# Altium PCB Panel.PcbDoc
Units mm, origin at the board's own origin, x right, y up, seen from the top; angles counter-clockwise.
Board outline 152.4 x 101.6 mm, 2 copper layers (Top Layer, Bottom Layer); 16 components, 22 nets, 90 pads, 0 vias.
Unrouted connection lines stored in the file: 6.
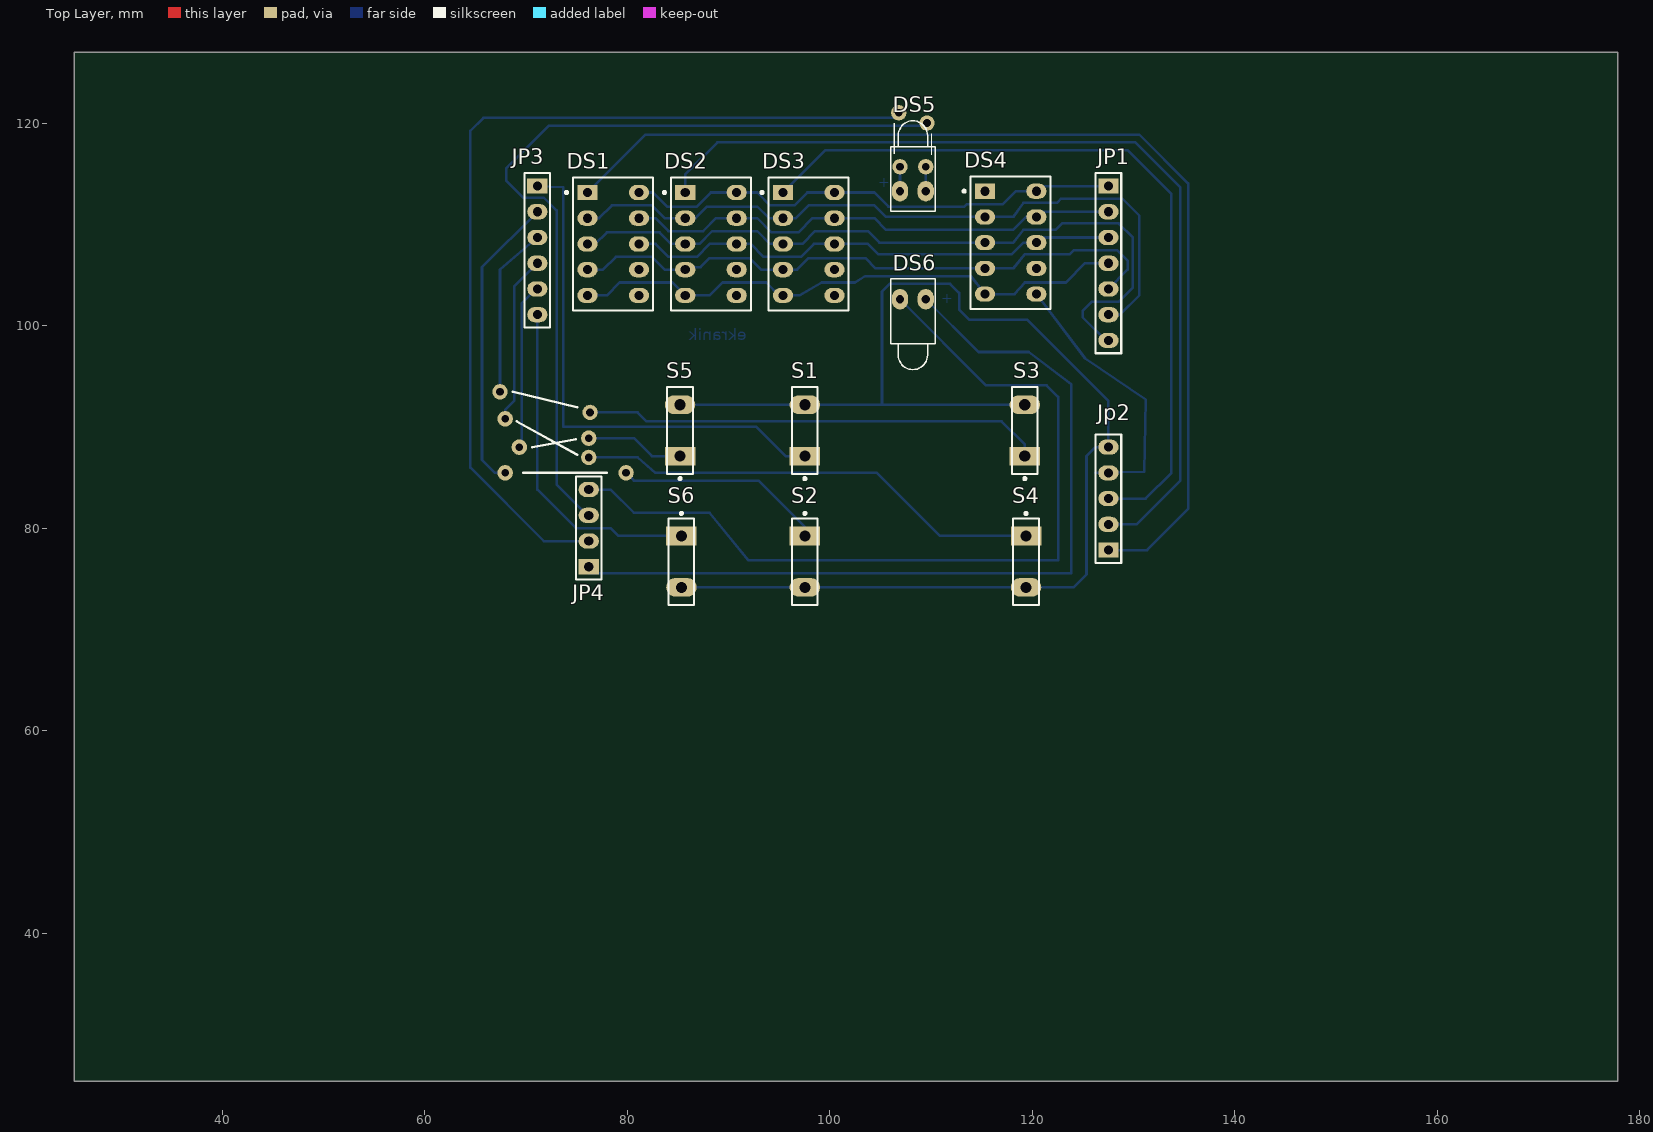
[diagram p0: Top Layer view]
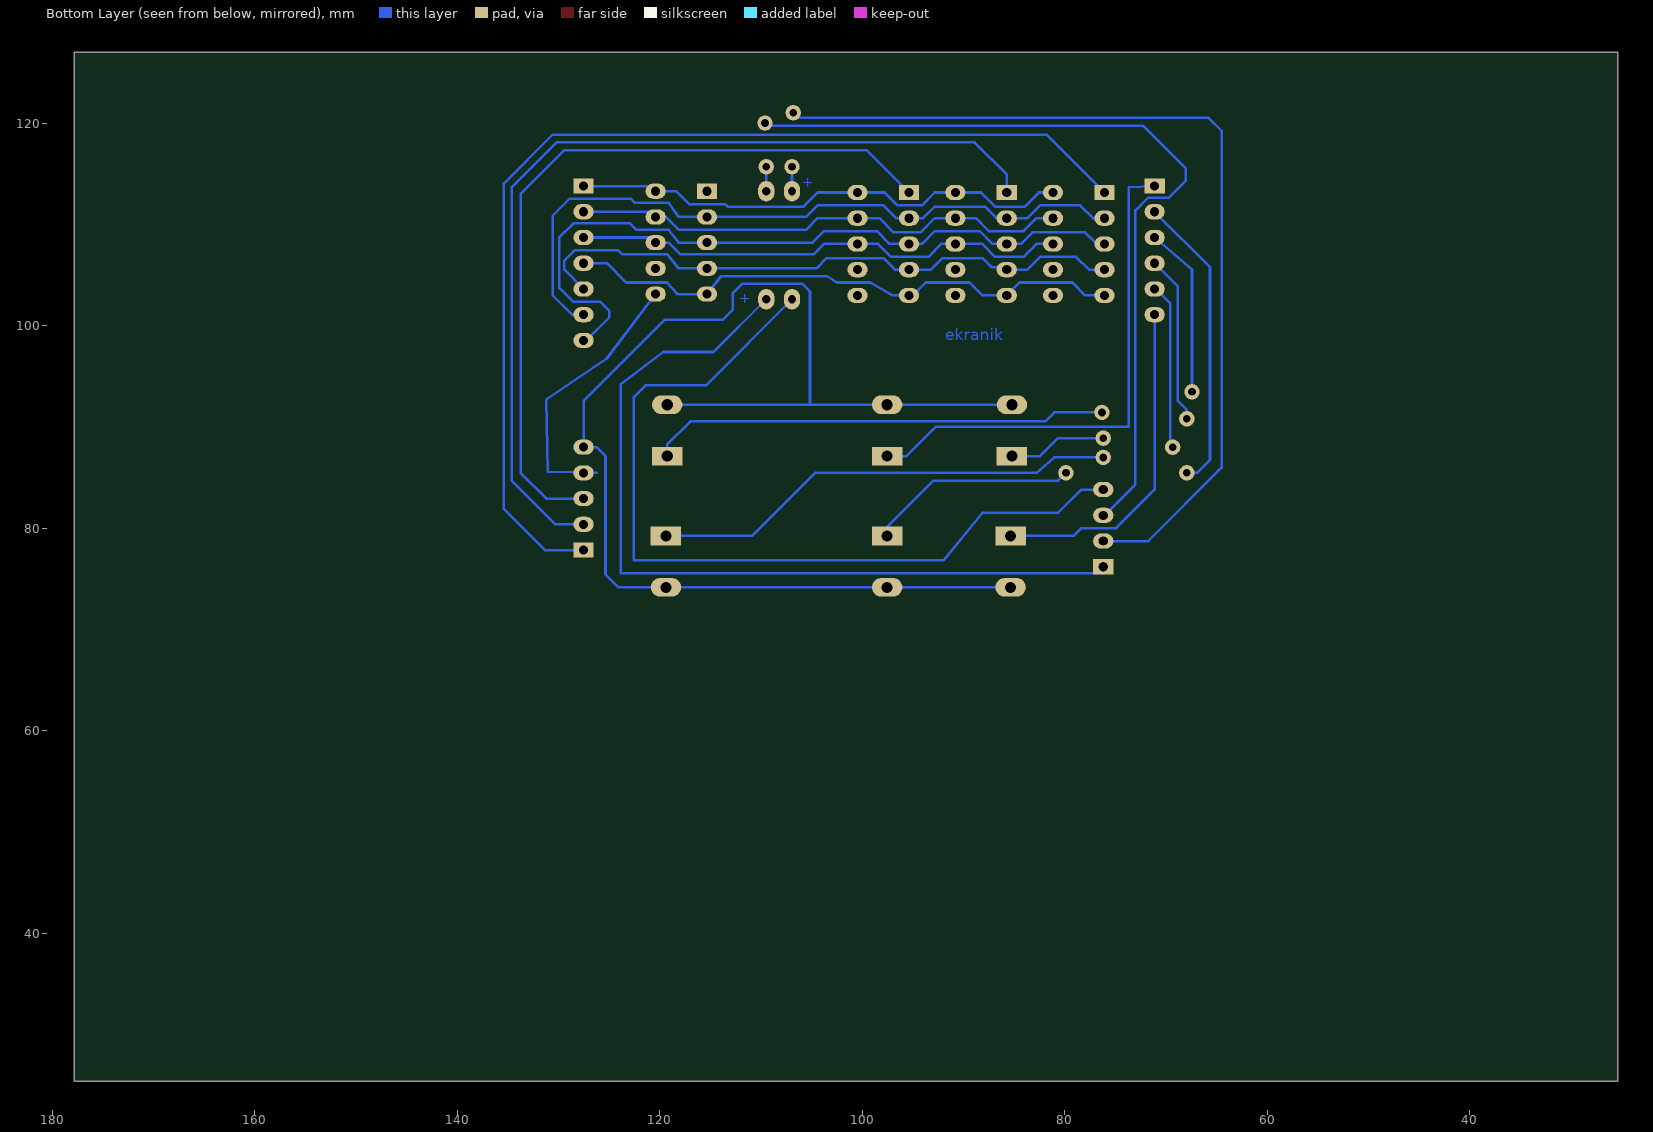
[diagram p1: Bottom Layer view, seen from below]

## Layer stack, top to bottom
Top Layer: signal copper 0.0356
Dielectric: dielectric 0.32, FR-4, Dk 4.8
Bottom Layer: signal copper 0.0356

## Board outline
25.4,25.4 177.8,25.4 177.8,127 25.4,127

## Design rules (kind name [scope] priority, off if disabled: settings)
Clearance [All] p1: gap=0.254
ComponentClearance [All] p1: gap=0.254 collisioncheckmode=0
PolygonConnect [All] p1: connectstyle=Relief reliefconductorwidth=0.254 reliefentries=4 polygonreliefangle="90 Angle"
RoutingLayers [All] p1: top layer="Not Used" bottom layer=Vertical
RoutingVias [All] p1: holewidth=0.711 width=1.27 viastyle="Through Hole" minholewidth=0.711 minwidth=1.27 maxholewidth=0.711 maxwidth=1.27
SolderMaskExpansion [All] p1: expansion=0.102
TestPointUsage [All] p1: valid=0 allowmultiple=FALSE
Testpoint [All] p1: side=15 testpointundercomponent=TRUE minsize=1.016 maxsize=2.54 preferedsize=1.524 minholesize=0 maxholesize=1.016 preferedholesize=0.813 testpointgrid=0.025 style=1023 order=1234567890
Width [All] p1: maxlimit=0.254 minlimit=0.254 preferedwidth=0.254
16 further rules are at their usual default settings.

## Components (designator, comment, footprint, x,y, rotation, side; value= is the part's Value field where it differs from the comment)
DS1 "setki" LEDDIP-10/C5.08 78.613,108.077 r270 top
DS2 "dziesi¹tki" LEDDIP-10/C5.08 88.265,108.077 r270 top
DS3 "jednoœci" LEDDIP-10/C5.08 97.917,108.077 r270 top
DS4 "metrum" LEDDIP-10/C5.08 117.856,108.204 r270 top
DS5 "red" LED-1 108.204,113.284 r90 top
DS6 "green" LED-1 108.204,102.616 r270 top
JP1 "Header 7" HDR1X7 127.508,113.792 r270 top
Jp2 "Header 5" HDR1X5 127.508,77.851 r90 top
JP3 "Header 6" HDR1X6 71.12,113.792 r270 top
JP4 "Header 4" HDR1X4 76.2,76.2 r90 top
S1 "-" SPST-2 97.536,89.662 r90 top
S2 "--" SPST-2 97.536,76.708 r270 top
S3 "str/st" SPST-2 119.253,89.662 r90 top
S4 "metrum" SPST-2 119.38,76.708 r270 top
S5 "+" SPST-2 85.217,89.662 r90 top
S6 "++" SPST-2 85.344,76.708 r270 top

## Footprints (in the part's own frame and the unit in brackets; to place one, negate y for a bottom-side part, rotate by r counter-clockwise, add the part's x,y. Pads: shape width x height; smd on the part's side, far side on the other; paste and mask are expansions set on the pad)
HDR1X4 [mm] "Connector; Header; 4 Position"
  rect 1.5x2 hole 0.9: 1(0,0)
  oval 1.5x2 hole 0.9: 2(2.54,0) 3(5.08,0) 4(7.62,0)
  silkscreen extent -1.27,-1.27 8.89,1.27
HDR1X5 [mm] "Connector; Header; 5 Position"
  rect 1.5x2 hole 0.9: 1(0,0)
  oval 1.5x2 hole 0.9: 2(2.54,0) 3(5.08,0) 4(7.62,0) 5(10.16,0)
  silkscreen extent -1.27,-1.27 11.43,1.27
HDR1X6 [mm] "Connector; Header; 6 Position"
  rect 1.5x2 hole 0.9: 1(0,0)
  oval 1.5x2 hole 0.9: 2(2.54,0) 3(5.08,0) 4(7.62,0) 5(10.16,0) 6(12.7,0)
  silkscreen extent -1.27,-1.27 13.97,1.27
HDR1X7 [mm] "Connector; Header; 7 Position"
  rect 1.5x2 hole 0.9: 1(0,0)
  oval 1.5x2 hole 0.9: 2(2.54,0) 3(5.08,0) 4(7.62,0) 5(10.16,0) 6(12.7,0) 7(15.24,0)
  silkscreen extent -1.27,-1.27 16.51,1.27
LED-1 [mm]
  oval 2x1.6 hole 0.8: 1(0,1.27) 2(0,-1.27)
  silkscreen extent -2,-2.2 6.95,2.2
LEDDIP-10/C5.08 [mm]
  rect 1.5x2 hole 0.9: 1(-5.08,-2.54)
  oval 1.5x2 hole 0.9: 2(-2.54,-2.54) 3(0,-2.54) 4(2.54,-2.54) 5(5.08,-2.54) 6(5.08,2.54) 7(2.54,2.54) 8(0,2.54) 9(-2.54,2.54) 10(-5.08,2.54)
  silkscreen extent -6.55,-4.72 6.55,3.95
SPST-2 [mm]
  rect 1.85x3 hole 1.1: 1(-2.54,0)
  oval 1.85x3 hole 1.1: 2(2.54,0)
  silkscreen extent -4.89,-1.27 4.28,1.27

## Part data
DS1 DS2 DS3 DS4: library part "Dpy Red-CC", "7.6 mm Black Surface 7-Segment Display: CC, RH DP"
DS5 DS6: library part LED1, "Typical RED GaAs LED"
JP1: "Header, 7-Pin"
Jp2: "Header, 5-Pin"
JP3: "Header, 6-Pin"
JP4: "Header, 4-Pin"
S1 S2 S3 S4 S5 S6: library part SW-PB, "Switch"

## Free pads (board coordinates)
  round 1.524 hole 0.762: 0(76.2,88.9) 1(76.2,86.995) 2(76.327,91.44) 3(79.883,85.471) 4(67.945,85.471) 5(69.342,88.011) 6(67.945,90.805) 7(67.437,93.472) 8(109.601,120.015) 9(109.474,115.697) 10(106.934,115.697) 11(106.807,121.031)

## Nets (pads, with @x,y where several pads share a name; then routed paths per layer and width w, separated by ;. In a path a pad name is that pad's centre, name@x,y a point inside that pad or via, vN(x,y) a via of type N, cw(c..) or ccw(c..) an arc to the next point about the centre after c; other vN are vias at no path point)
GND: Jp2.5 S1.2 S2.2 S3.2 S4.2 S5.2 S6.2 | length 133.2
  Bottom Layer w0.254: S5.2@85.217,91.694 85.725,92.202 S3.2 ; S6.2 124.079,74.168 125.349,75.438 125.349,87.122 126.238,88.011 Jp2.5 127.508,92.583 119.507,100.584 113.792,100.584 112.776,101.6 112.776,103.251 111.887,104.14 105.918,104.14 105.156,103.378 105.156,92.202
NetDS1_1: DS1.1 Jp2.1 | length 105.4
  Bottom Layer w0.254: DS1.1 81.788,118.872 130.556,118.872 135.382,114.046 135.382,81.915 131.318,77.851 Jp2.1
NetDS1_2: DS1.2 DS2.2 DS3.2 DS4.2 JP1.6 | length 70.8
  Bottom Layer w0.254: DS1.2 77.216,110.617 78.486,111.887 82.423,111.887 83.693,110.617 86.741,110.617 87.884,111.76 92.837,111.76 93.98,110.617 96.647,110.617 97.917,111.887 104.394,111.887 105.537,110.744 118.11,110.744 119.126,112.141 122.428,112.141 122.825,112.538 128.889,112.538 130.556,110.871 130.556,102.997 128.651,101.092 JP1.6
NetDS1_3: DS1.3 DS2.3 DS3.3 DS4.3 JP1.7 | length 73.3
  Bottom Layer w0.254: DS1.3 76.835,108.077 77.978,109.22 83.185,109.22 84.328,108.077 87.122,108.077 88.392,109.347 92.837,109.347 94.107,108.077 97.282,108.077 98.552,109.347 103.759,109.347 104.902,108.204 118.11,108.204 119.126,109.474 122.301,109.474 122.936,110.109 128.524,110.109 129.921,108.712 129.921,103.759 128.524,102.362 125.857,102.362 124.968,101.473 124.968,100.838 127.254,98.552 JP1.7
NetDS1_4: DS1.4 DS2.4 DS3.4 DS4.4 JP1.5 | length 61.1
  Bottom Layer w0.254: DS1.4 77.597,105.537 78.867,106.807 82.423,106.807 83.693,105.537 DS2.4 ; DS2.4@85.598,105.791 87.249,105.791 88.138,106.68 92.075,106.68 93.218,105.537 DS3.4 96.774,105.537 97.917,106.68 103.505,106.68 104.521,105.664 118.11,105.664 119.253,107.061 123.698,107.061 124.079,107.442 128.397,107.442 129.413,106.426 129.413,105.537 JP1.5
NetDS1_5: DS1.5 DS2.5 DS3.5 DS4.5 JP1.4 | length 56.9
  Bottom Layer w0.254: DS1.5 77.978,102.997 79.248,104.267 84.455,104.267 DS2.5 88.138,102.997 89.408,104.267 93.726,104.267 94.996,102.997 97.028,102.997 99.187,104.267 102.489,104.267 103.505,104.902 113.919,104.902 DS4.5 ; DS4.5@114.681,103.124 118.237,103.124 119.253,104.267 123.317,104.267 125.222,106.172 JP1.4
NetDS1_8: DS1.8 DS2.8 DS3.8 DS4.8 JP1.3 | length 49.6
  Bottom Layer w0.254: DS1.8 82.804,108.077 84.074,106.807 86.868,106.807 88.138,108.077 92.202,108.077 93.472,106.807 97.155,106.807 98.425,108.077 103.759,108.077 104.775,107.061 117.983,107.061 119.126,108.204 DS4.8 120.396,108.331 120.777,108.712 JP1.3
NetDS1_9: DS1.9 DS2.9 DS3.9 DS4.9 JP1.2 | length 49.8
  Bottom Layer w0.254: DS1.9 82.804,110.617 84.074,109.347 87.503,109.347 88.773,110.617 92.837,110.617 94.234,109.22 96.901,109.22 98.298,110.617 104.394,110.617 105.537,109.474 118.11,109.474 119.38,110.744 DS4.9 120.904,111.252 JP1.2
NetDS1_10: DS1.10 DS2.10 DS3.10 DS4.10 JP1.1 | length 50
  Bottom Layer w0.254: DS1.10 82.55,113.157 83.947,111.76 86.868,111.76 88.265,113.157 92.837,113.157 94.107,111.887 96.52,111.887 97.79,113.157 104.394,113.157 105.791,111.76 113.284,111.76 113.538,112.014 117.094,112.014 118.364,113.284 DS4.10 120.904,113.792 JP1.1
NetDS2_1: DS2.1 Jp2.2 | length 91.7
  Bottom Layer w0.254: DS2.1 85.725,114.935 88.9,118.11 130.175,118.11 134.62,113.665 134.62,84.709 130.302,80.391 Jp2.2
NetDS3_1: DS3.1 Jp2.3 | length 76.7
  Bottom Layer w0.254: DS3.1 99.568,117.348 129.413,117.348 133.731,113.03 133.731,85.471 131.191,82.931 Jp2.3
NetDS4_6: DS4.6 Jp2.4 | length 28.4
  Bottom Layer w0.254: DS4.6 125.222,96.774 131.191,92.71 131.064,85.598 126.238,85.471 Jp2.4
NetDS5_1: DS5.1 JP4.2 pad.10 pad.11 | length 93.4
  Bottom Layer w0.254: JP4.2 71.755,78.74 64.516,85.979 64.516,119.253 65.786,120.523 106.299,120.523 pad.11 ; DS5.1 pad.10
NetDS5_2: DS5.2 JP4.3 pad.8 pad.9 | length 84.5
  Bottom Layer w0.254: JP4.3 76.073,81.28 73.025,84.328 73.025,111.379 71.755,112.649 69.723,112.649 68.072,114.3 68.072,115.57 72.263,119.761 pad.8@109.474,119.761 ; DS5.2 pad.9
NetDS6_1: DS6.1 JP4.1 | length 83.9
  Bottom Layer w0.254: JP4.1@76.2,75.565 120.65,75.565 123.825,75.565 123.825,94.234 119.634,97.409 114.681,97.409 DS6.1
NetDS6_2: DS6.2 JP4.4 | length 85.3
  Bottom Layer w0.254: JP4.4 78.359,83.82 80.645,81.534 88.138,81.534 91.948,76.835 122.555,76.835 122.555,92.964 121.412,94.107 115.443,94.107 DS6.2
NetJP3_1: JP3.1 S1.1 | length 51.3
  Bottom Layer w0.254: JP3.1 71.247,113.792 73.66,113.665 73.66,96.647 73.66,90.043 80.264,90.043 92.71,90.043 95.631,87.122 S1.1
NetJP3_2: JP3.2 pad.3 pad.4 S2.1 | length 50.3
  Bottom Layer w0.254: pad.4 66.929,85.471 65.659,86.741 65.659,105.791 JP3.2 ; pad.3 80.645,84.709 92.964,84.709 97.536,80.137 S2.1
NetJP3_3: JP3.3 pad.2 pad.7 S3.1 | length 62.3
  Bottom Layer w0.254: pad.7 67.437,105.537 JP3.3 ; pad.2 81.026,91.44 81.915,90.551 116.967,90.551 119.253,88.265 S3.1
NetJP3_4: JP3.4 pad.1 pad.6 S4.1 | length 63
  Bottom Layer w0.254: pad.6 67.945,91.694 68.834,92.583 68.834,103.886 JP3.4 ; pad.1 81.032,86.995 82.804,85.471 104.648,85.471 110.871,79.248 S4.1
NetJP3_5: JP3.5 pad.0 pad.5 S5.1 | length 26.2
  Bottom Layer w0.254: pad.5 69.596,88.265 69.596,102.235 70.993,103.632 JP3.5 ; pad.0 80.645,88.9 82.423,87.122 S5.1
NetJP3_6: JP3.6 S6.1 | length 33.4
  Bottom Layer w0.254: JP3.6 71.12,83.82 74.93,80.01 78.359,80.01 79.121,79.248 S6.1
pads on no net: DS1.6 DS1.7 DS2.6 DS2.7 DS3.6 DS3.7 DS4.1 DS4.7

## Other copper
Bottom Layer:
  text "+" at 104.775,113.665 h1
  text "+" at 110.998,102.235 h1
  text "ekranik" at 91.821,98.552 h1.1

## Silkscreen, mask and mechanical layers (free items; w line width, h text height)
Top Overlay:
  rectangle: 106.299,116.967 106.426,120.015
  rectangle: 109.982,116.84 110.109,118.999
  lines w0.254: 68.707,93.472 75.057,91.948 ; 69.088,90.551 75.057,87.249 ; 69.723,85.471 77.978,85.471 ; 70.612,88.011 74.93,88.773